# Altium PCB PCB_motors.PcbDoc
Units mm, origin at the board's own origin, x right, y up, seen from the top; angles counter-clockwise.
Board outline 152.4 x 101.6 mm, 2 copper layers (Top Layer, Bottom Layer); 25 components, 24 nets, 62 pads, 0 vias.
Unrouted connection lines stored in the file: 3.
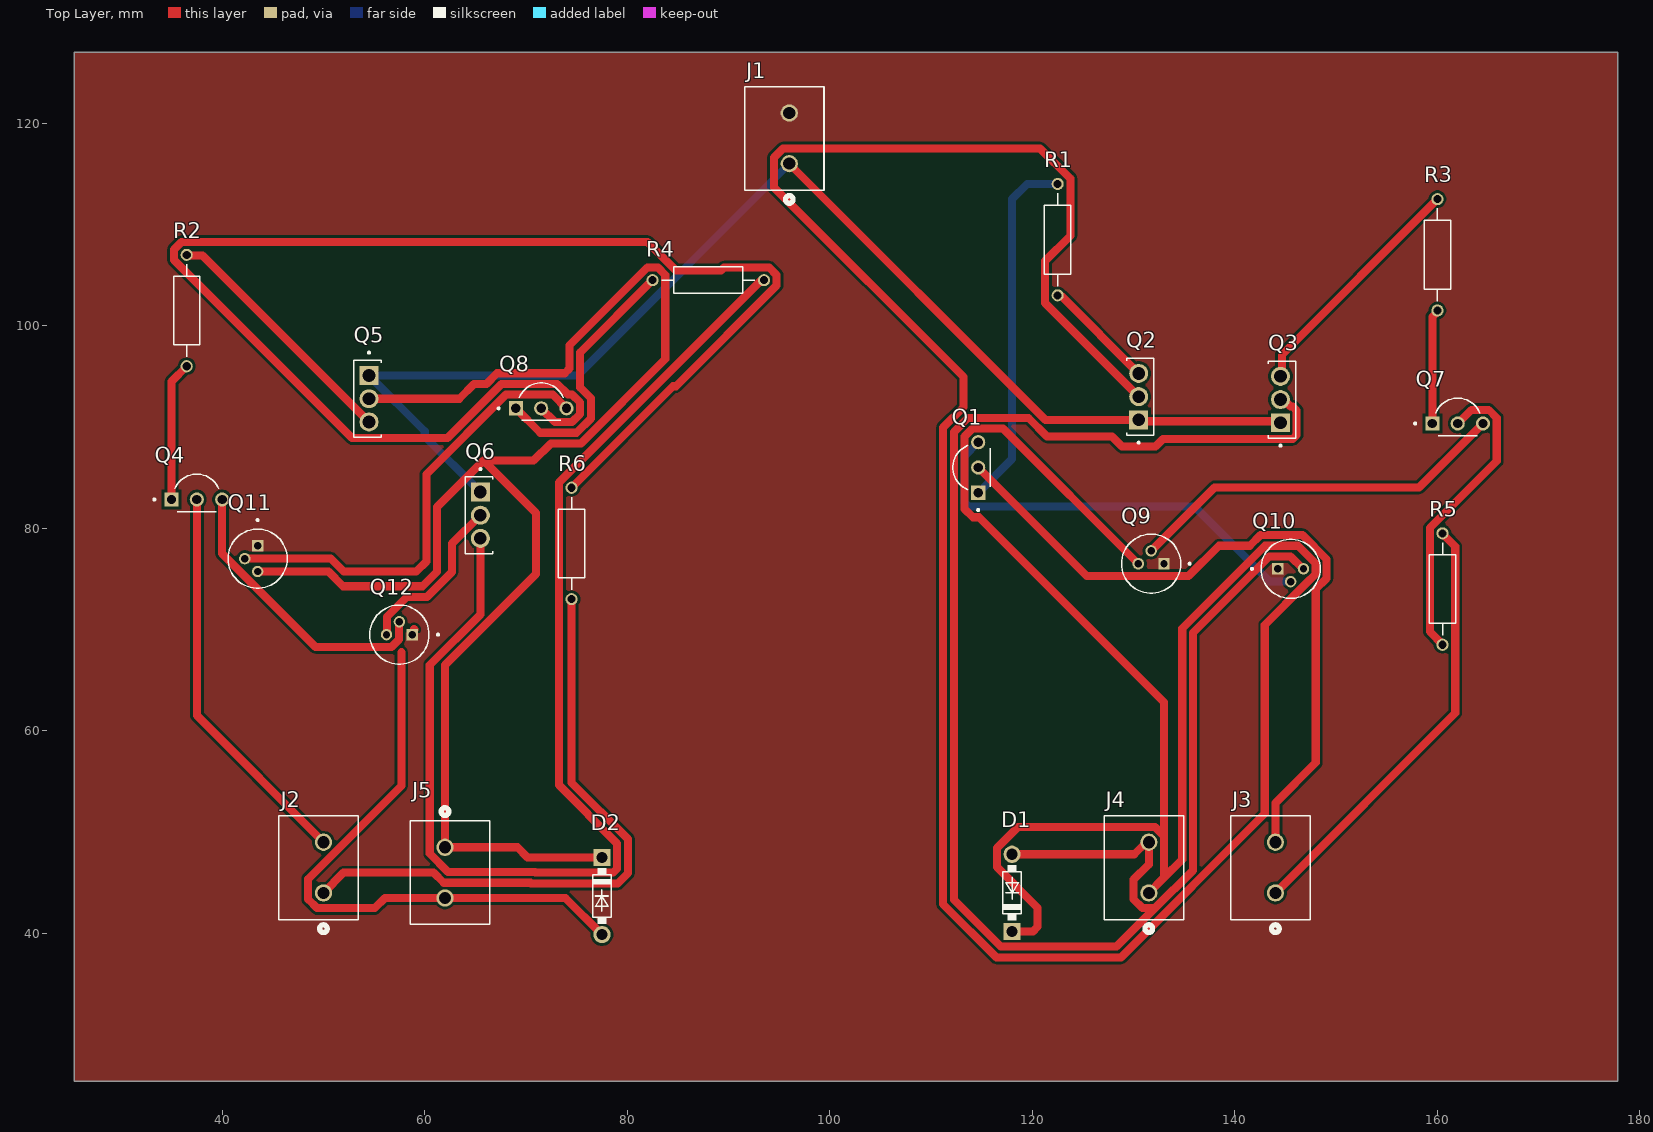
[diagram p0: Top Layer view]
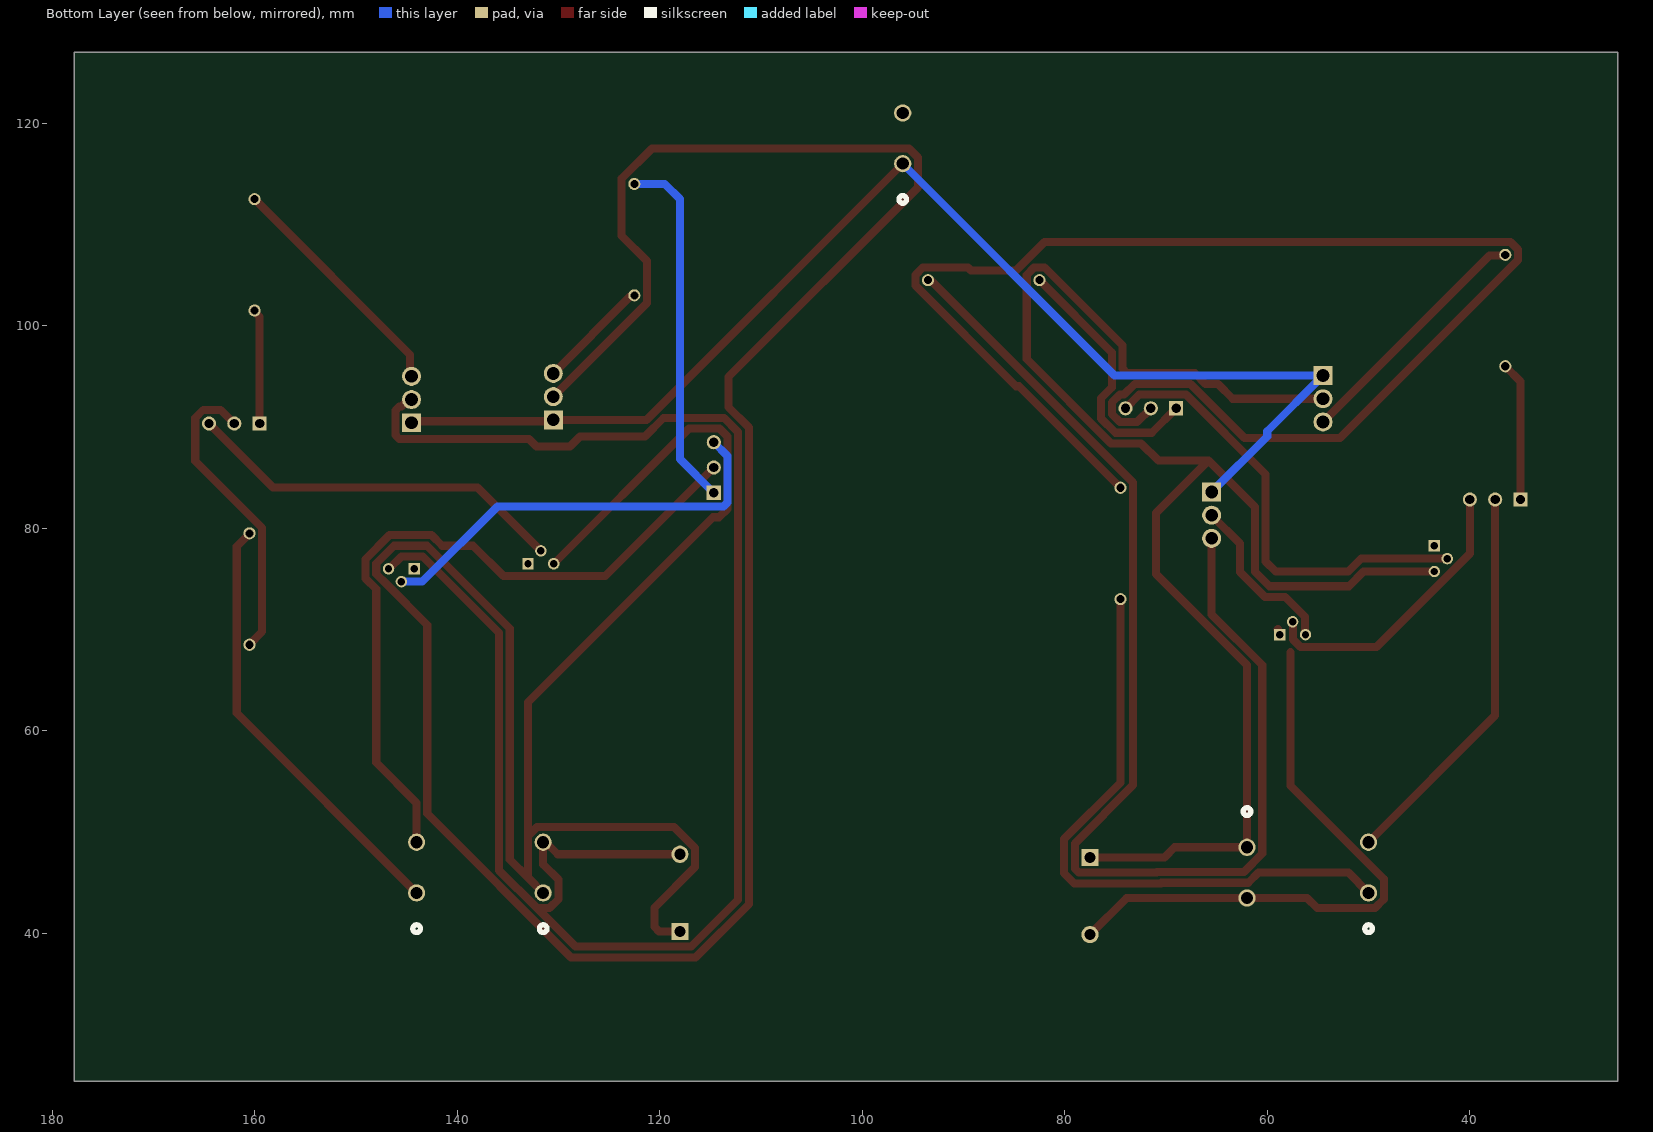
[diagram p1: Bottom Layer view, seen from below]
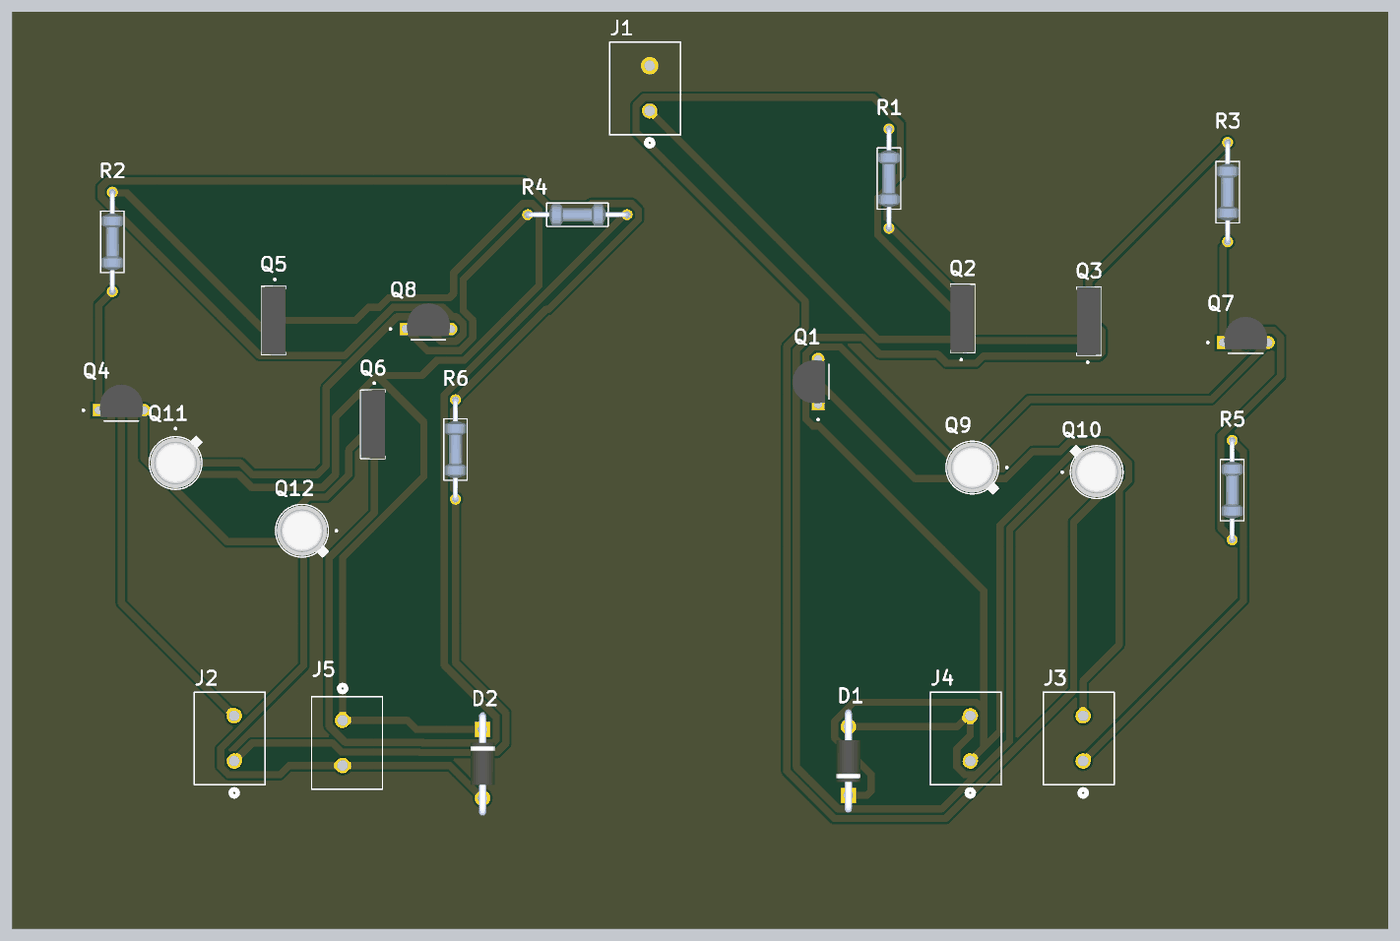
[diagram p2: 3D render of the assembled board from above, using the file's embedded part models]

## Layer stack, top to bottom
Top Solder: solder mask 0.0102, Solder Resist, Dk 3.5
Top Layer: signal copper 0.0356
Dielectric 1: dielectric 0.32, FR-4, Dk 4.8
Bottom Layer: signal copper 0.0356
Bottom Solder: solder mask 0.0102, Solder Resist, Dk 3.5

## Board outline
25.4,25.4 177.8,25.4 177.8,127 25.4,127

## Design rules (kind name [scope] priority, off if disabled: settings)
Clearance [All] p1: gap=0.254 ignorepadtopadclearanceinfootprint=FALSE
PolygonConnect [All] p1: connectstyle=Direct reliefconductorwidth=0.254 reliefentries=4 polygonreliefangle="90 Angle" airgapwidth=0.254
RoutingVias [All] p1: holewidth=0.711 width=1.27 viastyle="Through Hole" minholewidth=0.711 minwidth=1.27 maxholewidth=0.711 maxwidth=1.27
SolderMaskExpansion [All] p1: expansion=0 istentingtop=FALSE
SupplyNets "Schematic Supply Nets_1" [InNet('GND')] p1: voltage=0.000
SupplyNets "Schematic Supply Nets" [InNet('VCC')] p2: voltage=0.000
Width [All] p1: maxlimit=2 minlimit=0.254 preferedwidth=0.8 minimp=50.000000 maximp=50.000000 favimp=50.000000
30 further rules are at their usual default settings.

## Components (designator, comment, footprint, x,y, rotation, side; value= is the part's Value field where it differs from the comment)
D1 "1N4007E-E3/64" DIOAD520W79L463D238 118,44 r90 top
D2 "1N4007E-E3/64" DIOAD520W79L463D238 77.5,43.69 r270 top
J1 "395930602" CONN_SD-39543-004_NONE_02P_MOL 96,116 r90 top
J2 "395930602" CONN_SD-39543-004_NONE_02P_MOL 50,43.996 r90 top
J3 "395930602" CONN_SD-39543-004_NONE_02P_MOL 144,43.996 r90 top
J4 "395930602" CONN_SD-39543-004_NONE_02P_MOL 131.5,43.996 r90 top
J5 "395930602" CONN_SD-39543-004_NONE_02P_MOL 62,48.5 r270 top
Q1 "BC547B" TO92250P510H770-3 114,86 r90 top
Q2 "BD140" TO229P760X270X1364-3 130.655,93 r90 top
Q3 "BD140" TO229P760X270X1364-3 144.655,92.71 r90 top
Q4 "BC547B" TO92250P510H770-3 37.5,83.5 r0 top
Q5 "BD140" TO229P760X270X1364-3 54.345,92.79 r270 top
Q6 "BD140" TO229P760X270X1364-3 65.345,81.29 r270 top
Q7 "BC547B" TO92250P510H770-3 162,91 r0 top
Q8 "BC547B" TO92250P510H770-3 71.5,92.5 r0 top
Q9 "2N2222A" TO127P584H533-3 131.73,76.5 r180 top
Q10 "2N2222A" TO127P584H533-3 145.5,76 r0 top
Q11 "2N2222A" TO127P584H533-3 43.5,77 r270 top
Q12 "2N2222A" TO127P584H533-3 57.5,69.5 r180 top
R1 "1k" RESAD1100W55L680D260 122.5,108.5 r270 top
R2 "1k" RESAD1100W55L680D260 36.5,101.5 r90 top
R3 "100" RESAD1100W55L680D260 160,107 r270 top
R4 "100" RESAD1100W55L680D260 88,104.5 r180 top
R5 "1k" RESAD1100W55L680D260 160.5,74 r270 top
R6 "1k" RESAD1100W55L680D260 74.5,78.5 r90 top

## Footprints (in the part's own frame and the unit in brackets; to place one, negate y for a bottom-side part, rotate by r counter-clockwise, add the part's x,y. Pads: shape width x height; smd on the part's side, far side on the other; paste and mask are expansions set on the pad)
CONN_SD-39543-004_NONE_02P_MOL [mil]
  round 67 hole 47 mask+4.02: 1(0,0) 2(197,0)
  silkscreen extent -154,-135 300,174
DIOAD520W79L463D238 [mm]
  round 1.7 hole 1.1: A(3.81,0)
  rect 1.7x1.7 / inner round 1.7 / far side rect 1.7x1.7 hole 1.1: C(-3.81,0)
  silkscreen extent -2.72,-0.95 2.72,0.92, body extent -5.74,-1.35 5.74,1.35, height 2.7
RESAD1100W55L680D260 [mm]
  round 1.2 hole 0.8: 1(-5.5,0) 2(5.5,0)
  silkscreen extent -4.58,-1.3 4.58,1.3, body extent -5.77,-1.2 5.77,1.2, height 2.4
TO127P584H533-3 [mm]
  rect 1.13x1.13 / inner round 1.13 / far side rect 1.13x1.13 hole 0.73 mask+0.102: 1(-1.27,0)
  round 1.13 hole 0.73 mask+0.102: 2(0,-1.27) 3(1.27,0)
  silkscreen extent -3.91,-2.92 2.92,2.92, body extent -3.02,-2.79 2.79,3.02, height 5.33
TO229P760X270X1364-3 [mm]
  rect 1.875x1.875 / inner round 1.875 / far side rect 1.875x1.875 hole 1.25: 1(-2.29,0.155)
  round 1.875 hole 1.25: 2(0,0.155) 3(2.29,0.155)
  silkscreen extent -4.65,-1.35 3.8,1.35, body extent -3.8,-1.35 3.8,1.35, height 13.64
TO92250P510H770-3 [mm]
  rect 1.4x1.4 / inner round 1.4 / far side rect 1.4x1.4 hole 0.93: 1(-2.5,-0.655)
  round 1.4 hole 0.93: 2(0,-0.655) 3(2.5,-0.655)
  silkscreen extent -4.3,-1.85 2.18,1.85, body extent -2.38,-1.43 2.38,2.19, height 5.33

## Part data
D1 D2: "Diode 1KV 1A 2-Pin DO-204AL T/R", Package="DO-41 Vishay Semiconductor", Check_prices=https://www.snapeda.com/parts/1N4007E-E3/64/Vishay/view-part/?ref=eda, MF="Vishay Semiconductor", MP=1N4007E-E3/64, SnapEDA_Link=https://www.snapeda.com/parts/1N4007E-E3/64/Vishay/view-part/?ref=snap
J1 J2 J3 J4 J5: Package=None, Availability=Unavailable, MP=395930602, Price=None
Q1 Q4 Q7 Q8: "Bipolar (BJT) TransistÃ¶r NPN 45 V 100 mA 300MHz 625 mW Delikten TO-92 (TO-226)", Package="TO-92-3 ON Semiconductor", Availability="In Stock", Check_prices=https://www.snapeda.com/parts/BC547B/Onsemi/view-part/?ref=eda, MF="ON Semiconductor", MP=BC547B, Price=None, Purchase-URL=https://pricing.snapeda.com/search/part/BC547B/?ref=eda, SnapEDA_Link=https://www.snapeda.com/parts/BC547B/Onsemi/view-part/?ref=snap
Q2 Q3 Q5 Q6: "Bipolar (BJT) Transistor PNP 80 V 1.5 A - 1.25 W Through Hole TO-126-3", Package="TO-225-3 ON Semiconductor", Check_prices=https://www.snapeda.com/parts/BD140/Onsemi/view-part/?ref=eda, MF="ON Semiconductor", MP=BD140, SnapEDA_Link=https://www.snapeda.com/parts/BD140/Onsemi/view-part/?ref=snap
Q9 Q10 Q11 Q12: "Bipolar (BJT) Transistor NPN 50 V 800 mA - 500 mW Surface Mount 4-SMD", Package=None, Check_prices=https://www.snapeda.com/parts/2N2222A/Microsemi/view-part/?ref=eda, MF="Microsemi Corporation", MP=2N2222A, SnapEDA_Link=https://www.snapeda.com/parts/2N2222A/Microsemi/view-part/?ref=snap
R1 R2 R3 R4 R5 R6: library part MFR-25FBF52-100K, "100 kOhms Â±1% 0.25W, 1/4W Through Hole Resistor Axial - Metal Film", Package="RADIAL-2 YAGEO", Check_prices=https://www.snapeda.com/parts/MFR-25FBF52-100K/Yageo/view-part/?ref=eda, MF=Yageo, MP=MFR-25FBF52-100K, SnapEDA_Link=https://www.snapeda.com/parts/MFR-25FBF52-100K/Yageo/view-part/?ref=snap

## Nets (pads, with @x,y where several pads share a name; then routed paths per layer and width w, separated by ;. In a path a pad name is that pad's centre, name@x,y a point inside that pad or via, vN(x,y) a via of type N, cw(c..) or ccw(c..) an arc to the next point about the centre after c; other vN are vias at no path point)
A1: J2.1 R6.1 | length 61.1
  Top Layer w0.8: J2.1 52,45.996 60.885,45.996 61.88,45.001 70.439,45.001 70.498,44.942 79.057,44.942 80.058,45.943 80.058,49.319 74.5,54.877 R6.1
A2: J3.1 R5.1 | length 43.4
  Top Layer w0.8: J3.1 161.754,61.75 161.754,78.208 160.5,79.462 R5.1
B1: J2.2 Q4.2 | length 39
  Top Layer w0.8: Q4.2 37.5,61.5 J2.2
B2: J3.2 Q1.2 | length 71.5
  Top Layer w0.8: Q1.2 125.374,75.281 135.437,75.281 138.429,78.273 141.467,78.273 142.521,79.327 146.657,79.327 149.043,76.942 149.043,75.058 147.989,74.005 147.989,56.866 144,52.877 J3.2
GND: J1.2 Q9.1 Q10.1 Q11.1 Q12.1 | length 0.1
  Top Layer w0.8: Q12.1@58.949,70.051 Q12.1@59,70
NetD1_A: D1.A J4.2 Q3.2 Q10.3 | length 176.1
  Top Layer w0.8: D1.A 130.066,47.81 131.256,49 J4.2 131.5,46.817 129.995,45.312 129.995,43.373 130.877,42.491 132.123,42.491 ; Q3.2 144.791,92.71 145.489,92.012 145.708,92.012 146.092,91.628 146.092,89.212 145.708,88.828 132.909,88.828 132.145,88.064 128.855,88.064 127.854,89.065 121.444,89.065 119.601,90.908 113.658,90.908 112.247,89.497 112.247,43.318 116.879,38.686 128.318,38.686 132.123,42.491 ; Q10.3 146.712,76 145.493,77.219 143.394,77.219 135.856,69.681 135.856,46.224 132.123,42.491
NetD1_C: D1.C J4.1 Q2.2 Q9.3 | length 355.9
  Top Layer w0.8: D1.C 120.05,40.19 120.519,40.659 120.519,42.534 116.496,46.557 116.496,48.433 118.568,50.505 132.123,50.505 133.005,49.623 ; Q9.3 117.106,89.854 114.094,89.854 113.301,89.061 113.301,81.917 114.126,81.092 114.738,81.092 133.005,62.825 133.005,49.623 ; Q2.2 121.246,102.254 121.246,106.377 123.754,108.885 123.754,114.519 120.769,117.505 95.377,117.505 94.495,116.623 94.495,113.656 113.221,94.93 113.221,91.962 111.193,89.934 111.193,42.882 116.443,37.632 128.755,37.632 142.946,51.823 142.946,70.452 146.935,74.441 147.989,75.495 147.989,76.505 146.221,78.273 142.958,78.273 134.802,70.118 134.802,47.298 133.005,45.501 ; J4.1 133.005,45.501 ; 133.005,45.501 133.005,49.623
NetD2_A: D2.A J5.2 Q6.2 Q12.3 | length 76.3
  Top Layer w0.8: Q12.3 56.271,69.541 56.271,71.265 58.233,73.227 60.227,73.227 62.698,75.698 62.698,78.488 Q6.2 ; 57.702,67.758 57.702,54.574 48.495,45.367 48.495,43.373 49.377,42.491 55.064,42.491 56.069,43.496 J5.2 73.884,43.496 D2.A
NetD2_C: D2.C J5.1 Q5.2 Q11.3 | length 158.5
  Top Layer w0.8: Q11.3 50.498,75.73 51.947,74.281 59.79,74.281 61.219,75.71 61.219,82.099 64.292,85.172 65.805,86.685 ; Q5.2 63.417,92.79 64.88,94.253 66.102,94.253 67.156,95.307 73.831,95.307 74.3,95.776 74.3,98.073 81.981,105.754 83.019,105.754 83.754,105.019 83.754,96.703 75.434,88.383 72.453,88.383 70.761,86.692 65.812,86.692 65.805,86.685 ; D2.C 70.147,47.5 69.147,48.5 J5.1 62,66.5 71,75.5 71,81.491 65.805,86.685
NetQ1_1: Q1.1 R1.1 | length 35.5
  Bottom Layer w0.8: Q1.1 118,86.845 118,112.5 119.5,114 R1.1
NetQ1_3: Q1.3 Q10.2 | length 42
  Bottom Layer w0.8: Q1.3 113.301,87.146 113.301,82.529 113.684,82.146 136.029,82.146 143.445,74.73 Q10.2
NetQ2_3: Q2.3 R1.2 | length 11.2
  Top Layer w0.8: R1.2 122.577,102.923 122.867,102.923 Q2.3
NetQ3_3: Q3.3 R3.1 | length 23.9
  Top Layer w0.8: Q3.3 144.638,95.138 144.638,97.138 R3.1
NetQ4_1: Q4.1 R2.1 | length 13.8
  Top Layer w0.8: Q4.1 35,94.5 R2.1
NetQ4_3: Q4.3 Q12.2 | length 28.7
  Top Layer w0.8: Q4.3 40,77.506 49.225,68.281 56.735,68.281 57.459,69.005 57.459,70.729 Q12.2
NetQ5_3: Q5.3 R2.2 | length 24.8
  Top Layer w0.8: R2.2 36.577,106.923 38.077,106.923 Q5.3
NetQ6_3: Q6.3 R4.1 | length 121.7
  Top Layer w0.8: Q6.3 65.5,71.491 60.495,66.486 60.495,47.877 62.317,46.055 70.876,46.055 70.935,45.996 78.621,45.996 79.004,46.379 79.004,48.883 73.246,54.641 73.246,84.519 93.15,104.423 93.423,104.423 R4.1
NetQ7_1: Q7.1 R3.2 | length 11.4
  Top Layer w0.8: Q7.1 159.5,100.892 160,101.392 R3.2
NetQ7_2: Q7.2 R5.2 | length 30.4
  Top Layer w0.8: R5.2 160.5,68.538 159.246,69.792 159.246,80.019 165.854,86.627 165.854,90.906 165.061,91.699 163.354,91.699 Q7.2
NetQ7_3: Q7.3 Q9.2 | length 38
  Top Layer w0.8: Q9.2 137.992,84.032 158.187,84.032 Q7.3
NetQ8_1: Q8.1 R4.2 | length 26
  Top Layer w0.8: Q8.1 71.408,89.437 74.997,89.437 76.408,90.848 76.408,92.842 75.354,93.896 75.354,97.354 R4.2
NetQ8_2: Q8.2 R6.2 | length 148.2
  Top Layer w0.8: Q8.2 72.854,90.491 74.561,90.491 75.354,91.284 75.354,92.406 74.561,93.199 74.137,93.199 73.083,94.253 67.593,94.253 62.248,88.909 52.818,88.909 35.246,106.481 35.246,107.519 35.981,108.254 82.01,108.254 84.808,105.456 89.265,105.456 89.563,105.754 94.019,105.754 94.754,105.019 94.754,103.981 84.802,94.029 84.529,94.029 R6.2
NetQ8_3: Q8.3 Q11.2 | length 45.2
  Top Layer w0.8: Q11.2 50.718,77 52.002,75.716 59.167,75.716 60.165,76.714 60.165,85.335 68.029,93.199 72.646,93.199 Q8.3
VCC: J1.1 Q2.1 Q3.1 Q5.1 Q6.1 | length 125.3
  Top Layer w0.8: J1.1 121.29,90.71 Q2.1 130.645,90.565 144.355,90.565 Q3.1
  Bottom Layer w0.8: Q6.1 60,89.08 60,89.58 Q5.1 75.08,95.08 J1.1

## Polygon pours and split planes (outlines as drawn)
GND on Top Layer "GND_L01_P001" (solid, remove dead copper, pour order 1): 25.4,25.4 177.8,25.4 177.8,127 25.4,127
GND on Top Layer "GND_L01_P000" (solid, remove dead copper, pour order 0): 25.4,25.4 177.8,25.4 177.8,127 25.4,127